# EAGLE board irmouse (EAGLE 4.16)
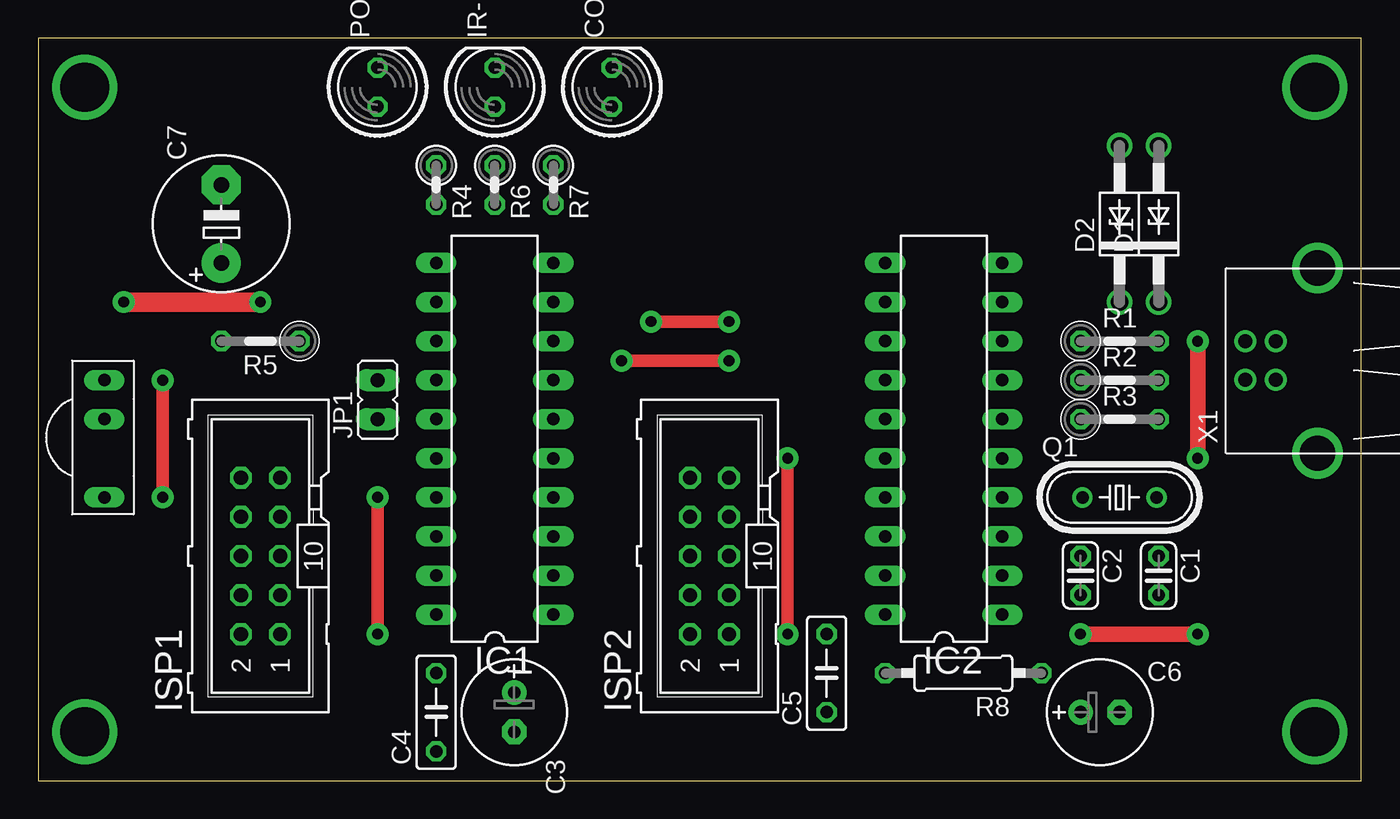
[diagram p0: board, top side]
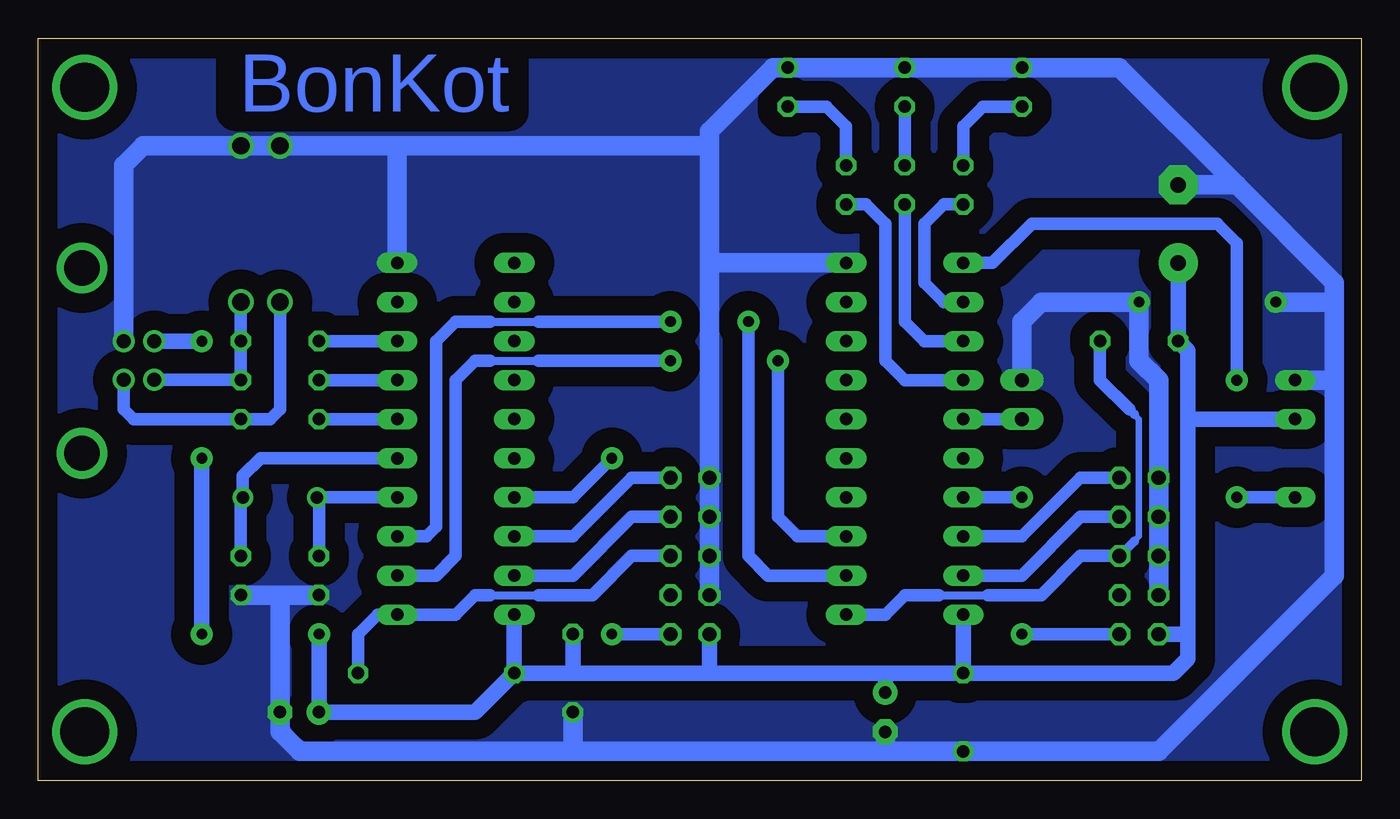
[diagram p1: board, bottom side, seen from below]

Size 86.03 x 48.25 mm. Coordinates in mm from the lower left corner, seen from the top.
Outline: 0,0 86.03,0 86.03,48.25 0,48.25 0,0
Copper layers (1*16): Top 0.035mm / dielectric 1.5mm / Bottom 0.035mm
Design rules "default": minimum track width 10mil, minimum drill 10mil, track to track 10mil, track to pad 10mil, pad to pad 10mil, via to via 10mil, smd to smd 10mil, copper to edge 10mil, drill to drill 10mil, minimum pad ring 10mil, minimum via ring 8mil, stop-mask expansion 1mil, vias tented up to drill 0mil, thermal gap 2mil

## Footprints (pad centres in the part's own frame; a part is rotated, then mirrored left to right if it is on the bottom)
C025-024X044 = drill 0.813 octagon: 1 -1.27,0; 2 1.27,0
E2,5-7 = drill 0.813 pad 1.6 round: + -1.27,0 | drill 0.813 pad 1.6 octagon: - 1.27,0
C050-025X075 = drill 0.813 octagon: 1 -2.54,0; 2 2.54,0
E5-8,5 = drill 1.016 pad 2.54 round: + -2.54,0 | drill 1.016 pad 2.54 octagon: - 2.54,0
LED5MM = drill 0.813 octagon: A -1.27,0; K 1.27,0
DO41Z10 = drill 1.118 round: A 5.08,0; C -5.08,0
DIL20 = drill 0.813 long: 1 -11.43,-3.81; 2 -8.89,-3.81; 3 -6.35,-3.81; 4 -3.81,-3.81; 5 -1.27,-3.81; 6 1.27,-3.81; 7 3.81,-3.81; 8 6.35,-3.81; 9 8.89,-3.81; 10 11.43,-3.81; 11 11.43,3.81; 12 8.89,3.81; 13 6.35,3.81; 14 3.81,3.81; 15 1.27,3.81; 16 -1.27,3.81; 17 -3.81,3.81; 18 -6.35,3.81; 19 -8.89,3.81; 20 -11.43,3.81
ML10 = drill 0.914 octagon: 1 -5.08,-1.27; 2 -5.08,1.27; 3 -2.54,-1.27; 4 -2.54,1.27; 5 0,-1.27; 6 0,1.27; 7 2.54,-1.27; 8 2.54,1.27; 9 5.08,-1.27; 10 5.08,1.27
JP1 = drill 0.914 long: 1 0,-1.27; 2 0,1.27
HC49/S = drill 0.813 round: 1 -2.413,0; 2 2.413,0
0207/5V = drill 0.813 octagon: 1 -2.54,0; 2 2.54,0
0207/2V = drill 0.813 octagon: 1 -1.27,0; 2 1.27,0
0207/10 = drill 0.813 octagon: 1 -5.08,0; 2 5.08,0
TSOP17XX = drill 0.813 long: GND -3.81,0; OUT 3.81,0; V+ -1.27,0
USB-B-H = drill 0.914 round: D+ 0,1.25; D- 1.981,1.25; GND 0,-1.25; VBUS 1.981,-1.25 | drill 2.286 round: P$1 -2.718,-6.02; P$2 -2.718,6.02

## Placement (x,y rotation side)
C1  27p  [C025-024X044]  72.86,13.33 270 top
C2  27p  [C025-024X044]  67.78,13.33 270 top
C3  47u  [E2,5-7]  30.95,4.44 270 top
C4  100n  [C050-025X075]  25.87,4.44 90 top
C5  100n  [C050-025X075]  51.27,6.98 90 top
C6  47u  [E2,5-7]  69.05,4.44 0 top
C7  10u  [E5-8,5]  11.9,36.19 90 top
CODE-MATCH  [LED5MM]  37.3,45.08 90 top
D1  3V6  [DO41Z10]  72.86,36.19 90 top
D2  3V6  [DO41Z10]  70.32,36.19 90 top
IC1  AT90S2313P  [DIL20]  29.68,22.22 90 top
IC2  AT90S2313P  [DIL20]  58.89,22.22 90 top
IR-DATA  [LED5MM]  29.68,45.08 90 top
ISP1  [ML10]  14.44,14.6 90 top
ISP2  [ML10]  43.65,14.6 90 top
JP1  [JP1]  22.06,24.76 0 top
POWER  [LED5MM]  22.06,45.08 90 top
Q1  12MHz  [HC49/S]  70.32,18.41 0 top
R1  2k2  [0207/5V]  70.32,28.57 0 top
R2  68R  [0207/5V]  70.32,26.03 0 top
R3  68R  [0207/5V]  70.32,23.49 0 top
R4  330R  [0207/2V]  25.87,38.73 270 top
R5  10k  [0207/5V]  14.44,28.57 180 top
R6  330R  [0207/2V]  29.68,38.73 270 top
R7  330R  [0207/2V]  33.49,38.73 270 top
R8  10k  [0207/10]  60.16,6.98 180 top
U$1  TSOP1736  [TSOP17XX]  4.28,22.22 270 top
X1  USB-B-H  [USB-B-H]  80.48,27.3 180 top

## Library data of the parts
C1-C7 R1-R8 = rcl
CODE-MATCH IR-DATA POWER = led
D1 D2 = diode
IC1 IC2 = avr
ISP1 ISP2 = con-harting-ml
JP1 = jumper
Q1 = crystal
U$1 = tsop
X1 = con-usb

## Nets
+5V: C3.+ C4.2 C5.2 C6.+ C7.+ IC1.20 IC2.20 ISP1.2 ISP2.2 R5.2 R8.2 U$1.V+ X1.VBUS
GND: C1.2 C2.2 C3.- C4.1 C5.1 C6.- C7.- CODE-MATCH.K D1.A D2.A IC1.10 IC2.10 IR-DATA.K ISP1.4 ISP1.6 ISP1.8 ISP1.10 ISP2.4 ISP2.6 ISP2.8 ISP2.10 JP1.2 POWER.K U$1.GND X1.GND
N$1: C1.1 IC2.5 Q1.2
N$2: IC1.1 ISP1.5 R5.1
N$3: IC1.3 IC2.2
N$4: C2.1 IC2.4 Q1.1
N$5: POWER.A R4.1
N$6: D1.C R1.2 R2.2 X1.D-
N$7: D2.C R3.2 X1.D+
N$8: IR-DATA.A R6.1
N$9: IC1.11 U$1.OUT
N$10: IC2.6 R3.1
N$11: IC2.7 R2.1
N$12: IC2.8 R1.1
N$13: IC1.2 IC2.3
N$14: CODE-MATCH.A R7.1
N$15: IC1.12 R4.2
N$16: IC1.13 R6.2
N$17: IC1.14 R7.2
N$18: IC1.15 JP1.1
N$19: IC2.19 ISP2.7
N$20: IC2.1 ISP2.5 R8.1
N$21: IC1.19 ISP1.7
N$22: IC2.18 ISP2.9
N$23: IC2.17 ISP2.1
N$24: IC1.17 ISP1.1
N$25: IC1.18 ISP1.9

## Tracks (layer width: path | path; a pad name or v marks a point on that pad's centre or on a via)
+5V  (via drill 0.7 pad 1.42)
  Top 1.016: v75.4,20.95 v75.4,28.57 | v67.78,9.52 v75.4,9.52
  Bottom 1.016: 11.27,23.49 U$1.V+ | 11.27,9.52 11.27,7.93 12.22,6.98 C4.2 | 11.27,9.52 11.27,23.49 | 11.27,9.52 ISP1.2 | C7.+ R5.2 11.27,27.93 11.27,23.49 | C4.2 IC1.20 | C4.2 30.95,6.98 | 30.95,6.98 42.38,6.98 | 42.38,6.98 51.27,6.98 | 51.27,6.98 R8.2 | 42.38,6.98 ISP2.2 | 51.27,6.98 C5.2 | R8.2 IC2.20 | 30.95,6.98 C3.+ | X1.VBUS 75.42,28.55 v75.4,28.57 | R8.2 57.62,4.44 C6.+ v67.78,9.52 | v75.4,9.52 v75.4,20.95
GND  (via drill 0.7 pad 1.42)
  Top 1.27: v5.55,31.11 v14.44,31.11
  Bottom 1.27: 1.74,26.03 U$1.GND | 1.74,26.03 1.74,31.11 | 1.74,31.11 v5.55,31.11 | JP1.2 22.06,29.84 20.79,31.11 v14.44,31.11 14.44,27.3 13.17,26.03 ISP1.10 ISP1.8 ISP1.6 ISP1.4 | 42.38,41.27 62.7,41.27 | 62.7,41.27 D2.A D1.A 79.21,41.27 80.48,40 X1.GND | 42.38,41.27 42.38,33.65 | 42.38,33.65 ISP2.10 ISP2.8 ISP2.6 ISP2.4 | 42.38,33.65 IC1.10 | 62.7,41.27 IC2.10 | 1.74,26.03 1.74,13.33 13.17,1.9 C4.1 30.95,1.9 | 30.95,1.9 51.27,1.9 | 51.27,1.9 69.05,1.9 70.32,3.17 C6.- 70.32,12.06 | 70.32,12.06 C1.2 | 70.32,12.06 C2.2 | 30.95,1.9 C3.- | 51.27,1.9 C5.1 | 1.74,31.11 1.74,32.38 8.09,38.73 | 8.09,38.73 C7.- | 8.09,38.73 15.71,46.35 POWER.K IR-DATA.K CODE-MATCH.K 38.25,46.35 42.38,42.22 42.38,41.27
  pour Bottom (isolate 1.27, no thermals): 0.47,47.62 85.56,47.62 85.56,0.63 0.47,0.63
N$1
  Bottom 0.813: C1.1 72.86,18.41 Q1.2 72.73,19.81 71.59,20.95 IC2.5
N$2
  Bottom 0.406: 14.76,15.55 14.44,15.87 14.44,23.49 14.76,23.81
  Bottom 0.508: 27.46,12.06 24.28,12.06
  Bottom 0.61: 14.76,15.55 ISP1.5 | 14.76,23.81 15.08,24.12
  Bottom 0.813: ISP1.5 18.25,14.6 20.79,12.06 24.28,12.06 | 27.46,12.06 29.68,12.06 30.95,10.79 IC1.1 | R5.1 16.98,26.03 15.08,24.12
N$3  (via drill 0.7 pad 1.42)
  Top 0.813: v37.94,27.3 v44.92,27.3
  Bottom 0.508: 56.67,27.3 53.49,27.3
  Bottom 0.813: IC2.2 60.16,13.33 58.89,14.6 58.89,26.03 57.62,27.3 56.67,27.3 | v44.92,27.3 53.49,27.3 | v37.94,27.3 37.94,17.14 36.66,15.87 IC1.3
N$4
  Bottom 0.813: C2.1 67.78,18.41 Q1.1 IC2.4
N$5
  Bottom 0.813: R4.1 25.87,42.54 24.6,43.81 POWER.A
N$6
  Bottom 0.813: X1.D- 72.88,26.05 R2.2 R1.2 D1.C
N$7
  Bottom 0.813: D2.C 70.32,24.12 70.95,23.49 R3.2 79.84,23.49 80.48,24.12 X1.D+
N$8
  Bottom 0.813: R6.1 IR-DATA.A
N$9  (via drill 0.7 pad 1.42)
  Top 0.813: v8.09,18.41 v8.09,26.03
  Bottom 0.813: U$1.OUT v8.09,18.41 | v8.09,26.03 8.09,34.92 9.36,36.19 21.42,36.19 23.96,33.65 IC1.11
N$10
  Bottom 0.813: IC2.6 R3.1
N$11
  Bottom 0.813: IC2.7 R2.1
N$12
  Bottom 0.813: IC2.8 R1.1
N$13  (via drill 0.7 pad 1.42)
  Top 0.813: v39.84,29.84 v44.92,29.84
  Bottom 0.508: 56.67,29.84 53.49,29.84
  Bottom 0.813: IC2.3 60.8,15.87 60.16,16.5 60.16,28.57 58.89,29.84 56.67,29.84 | v44.92,29.84 53.49,29.84 | v39.84,29.84 39.84,14.6 38.57,13.33 IC1.2
N$14
  Bottom 0.813: R7.1 33.49,42.54 34.76,43.81 CODE-MATCH.A
N$15
  Bottom 0.813: IC1.12 27.14,31.11 28.41,32.38 28.41,36.19 27.14,37.46 R4.2
N$16
  Bottom 0.813: IC1.13 28.41,28.57 29.68,29.84 R6.2
N$17
  Bottom 0.813: IC1.14 29.68,26.03 30.95,27.3 30.95,36.19 32.22,37.46 R7.2
N$18
  Bottom 0.813: JP1.1 IC1.15
N$19
  Bottom 0.813: IC2.19 51.27,13.33 47.46,17.14 ISP2.7
N$20
  Bottom 0.508: 56.67,12.06 53.49,12.06
  Bottom 0.813: 56.67,12.06 57.62,12.06 58.89,10.79 IC2.1 63.97,10.79 65.24,9.52 R8.1 | ISP2.5 47.46,14.6 50,12.06 53.49,12.06
N$21
  Bottom 0.813: IC1.19 22.06,13.33 18.25,17.14 ISP1.7
N$22
  Bottom 0.813: IC2.18 51.27,15.87 47.46,19.68 ISP2.9
N$23  (via drill 0.7 pad 1.42)
  Top 0.813: v48.73,9.52 v48.73,20.95
  Bottom 0.813: IC2.17 51.27,18.41 v48.73,20.95 | ISP2.1 v48.73,9.52
N$24  (via drill 0.7 pad 1.42)
  Top 0.813: v22.06,9.52 v22.06,18.41
  Bottom 0.813: v22.06,18.41 IC1.17 | ISP1.1 v22.06,9.52
N$25
  Bottom 0.813: IC1.18 22.06,15.87 18.25,19.68 ISP1.9
N$26  (via drill 3.2 pad 3.81)
  other vias: 3.01,45.08
N$27  (via drill 3.2 pad 3.81)
  other vias: 3.01,3.17
N$28  (via drill 3.2 pad 3.81)
  other vias: 83.02,3.17
N$29  (via drill 3.2 pad 3.81)
  other vias: 83.02,45.08

## Text on the board
Bottom: BonKot